# Allegro board KEY_ARRAY.brd
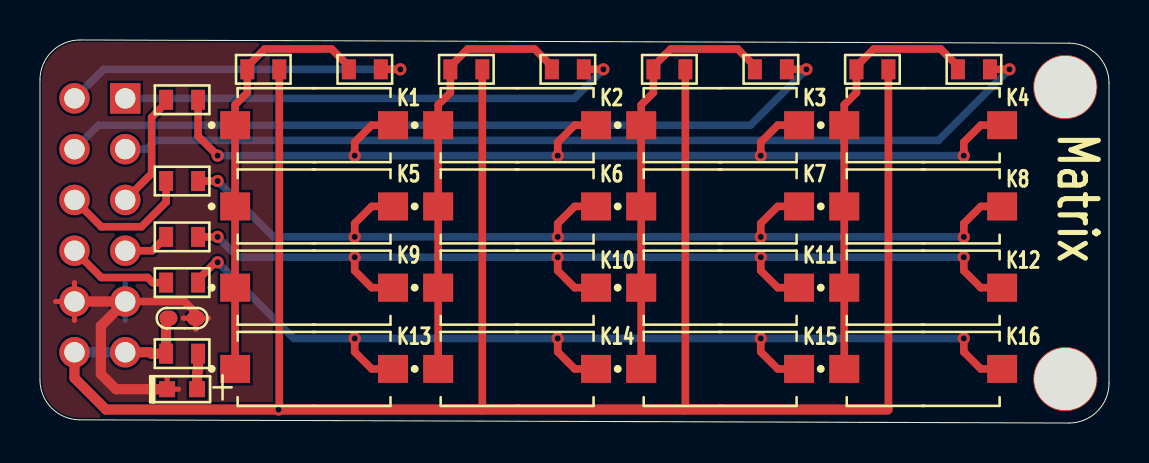
[diagram p0: board, top side]
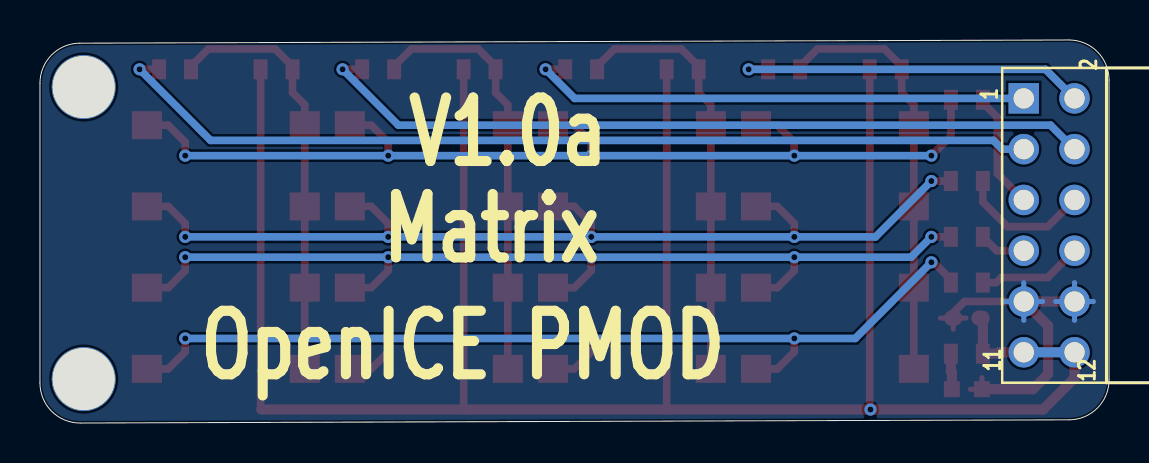
[diagram p1: board, bottom side, seen from below]

Outline 53.5 x 19.16 mm; copper layers: TOP, BOTTOM. Coordinates in mm from the lower left corner of the outline.
Outline path: 0,17.16 0,2.16 arc(0.58,0.75) 1.99,0.16 51.49,0 arc(52.91,0.58) 53.5,2 53.5,17 arc(52.91,18.41) 51.5,19 2.01,19.16 arc(0.59,18.58) 0,17.16

## Placement (name value [footprint] x y rotation side)
C1  0.1uF  [C0603]  7.11 5.25 180 top
JP1  PMOD  [HDR_F2X6_PMOD]  1.73 9.89 90 bottom
MP1  MountHole  [MGT3200CIR3200D]  51.31 16.81 0 top
MP2  MountHole  [MGT3200CIR3200D]  51.31 2.2 0 top
R1  10K  [R0603]  11.18 17.69 180 top
R2  10K  [R0603]  21.34 17.69 180 top
R3  10K  [R0603]  31.5 17.69 180 top
R4  10K  [R0603]  41.66 17.69 180 top
R5  100  [R0603]  16.26 17.69 0 top
R6  100  [R0603]  26.42 17.69 0 top
R7  100  [R0603]  36.58 17.69 0 top
R8  100  [R0603]  46.74 17.69 0 top
R9  100  [R0603]  7.11 16.17 180 top
R10  100  [R0603]  7.11 12.1 180 top
R11  100  [R0603]  7.11 9.31 180 top
R12  100  [R0603]  7.11 7.02 180 top
R13  100  [R0603]  7.11 3.47 0 top
S1  TL1015AF160QG  [SW_KEY_2PIN]  13.72 14.9 0 top
S2  TL1015AF160QG  [SW_KEY_2PIN]  23.88 14.9 0 top
S3  TL1015AF160QG  [SW_KEY_2PIN]  34.04 14.9 0 top
S4  TL1015AF160QG  [SW_KEY_2PIN]  44.2 14.9 0 top
S5  TL1015AF160QG  [SW_KEY_2PIN]  13.72 10.83 0 top
S6  TL1015AF160QG  [SW_KEY_2PIN]  23.88 10.83 0 top
S7  TL1015AF160QG  [SW_KEY_2PIN]  34.04 10.83 0 top
S8  TL1015AF160QG  [SW_KEY_2PIN]  44.2 10.83 0 top
S9  TL1015AF160QG  [SW_KEY_2PIN]  13.72 6.77 0 top
S10  TL1015AF160QG  [SW_KEY_2PIN]  23.88 6.77 0 top
S11  TL1015AF160QG  [SW_KEY_2PIN]  34.04 6.77 0 top
S12  TL1015AF160QG  [SW_KEY_2PIN]  44.2 6.77 0 top
S13  TL1015AF160QG  [SW_KEY_2PIN]  13.72 2.71 0 top
S14  TL1015AF160QG  [SW_KEY_2PIN]  23.88 2.71 0 top
S15  TL1015AF160QG  [SW_KEY_2PIN]  34.04 2.71 0 top
S16  TL1015AF160QG  [SW_KEY_2PIN]  44.2 2.71 0 top
V1  19-217UTD/S756-3/TR8  [LED0603]  7.11 1.69 0 top

## Library data of the parts
C1 = CAP
JP1 = HEADER 6X2_0
MP1 MP2 = MountHole
R1-R13 = RES
S1-S16 = TL1015AF160QG
V1 = LED

## Footprints (pads in the part's own frame, mm; a bottom-side part is the same pattern mirrored in y, then rotated)
C0603
  oval 0.914x0.762 smd: 1(-0.686,0) 2(0.686,0)
HDR_F2X6_PMOD
  rect 1.524x1.524 hole 1.016: 1(6.35,2.54)
  round 1.524 hole 1.016: 2(6.35,0) 3(3.81,2.54) 4(3.81,0) 5(1.27,2.54) 6(1.27,0) 7(-1.27,2.54) 8(-1.27,0) 9(-3.81,2.54) 10(-3.81,0) 11(-6.35,2.54) 12(-6.35,0)
LED0603
  rect 0.8x0.8 smd: A(0.75,0) C(-0.75,0)
MGT3200CIR3200D
  round 3.2 hole 3.1: 1(0,0)
R0603
  rect 0.7x1 smd: 1(-0.8,0) 2(0.8,0)
SW_KEY_2PIN
  rect 1.5x1.4 smd: 1(-3.95,0) 2(3.95,0)

## Nets
GND: C1.1 JP1.9 JP1.10 V1.C
VDD: C1.2 JP1.11 JP1.12 R1.1 R2.1 R3.1 R4.1 R13.1
KEY4X4_0: JP1.3 R8.2
KEY4X4_1: JP1.4 R7.2
KEY4X4_2: JP1.1 R6.2
KEY4X4_3: JP1.2 R5.2
KEY4X4_4: JP1.5 R9.2
KEY4X4_5: JP1.6 R10.2
KEY4X4_6: JP1.7 R11.2
KEY4X4_7: JP1.8 R12.2
N17274216: R9.1 S1.2 S2.2 S3.2 S4.2
N17275428: R10.1 S5.2 S6.2 S7.2 S8.2
N17275772: R11.1 S9.2 S10.2 S11.2 S12.2
N17276116: R12.1 S13.2 S14.2 S15.2 S16.2
N17276249: R2.2 R6.1 S2.1 S6.1 S10.1 S14.1
N17276371: R1.2 R5.1 S1.1 S5.1 S9.1 S13.1
N17276477: R3.2 R7.1 S3.1 S7.1 S11.1 S15.1
N17276514: R4.2 R8.1 S4.1 S8.1 S12.1 S16.1
N17305115: R13.2 V1.A

Pads without a net: MP1 1; MP2 1

## Via types
v1: diameter 0.61, hole 0.305, TOP to BOTTOM, 25 vias

## Routing (per net, layer and track width the routed paths; a pad name or vN(x,y) marks a point on that pad's centre or on a via; arc(x,y) is an arc through that point)
GND: length 27.7
  TOP w0.254: 7.16,5.25 C1.1 ; C1.1 8.43,5.25 ; C1.1 7.8,4.69 ; 1.73,5.14 JP1.10 ; JP1.10 1.73,7.02 ; JP1.10 0.79,6.08 ; 6.36,2.27 V1.C 6.94,1.69
  TOP w0.381: JP1.9 7.23,6.08 7.8,5.51 C1.1
  TOP w0.508: JP1.10 JP1.9 3.05,4.86 3.05,2.45 3.81,1.69 V1.C
  BOTTOM w0.254: 1.73,5.14 JP1.10 ; JP1.10 0.79,6.08 ; JP1.10 2.67,6.08 ; JP1.10 1.73,7.02 ; JP1.9 5.21,6.08 ; JP1.9 4.27,7.02 ; JP1.9 4.27,5.14 ; JP1.9 3.33,6.08
VDD: length 117.2
  TOP w0.381: R2.1 22.14,0.71 22.1,0.67 ; 32.26,0.67 32.3,0.71 R3.1 ; R1.1 11.98,0.71 v1(11.94,0.67) ; 42.42,0.67 42.46,0.71 R4.1
  TOP w0.508: C1.2 6.31,5.13 R13.1 5.58,3.47 5.51,3.54 JP1.11 ; 42.42,0.67 v1(11.94,0.67) 3.3,0.67 1.73,2.25 JP1.12
  BOTTOM w0.508: JP1.11 JP1.12
KEY4X4_0: length 46.9
  TOP w0.381: R8.2 v1(48.51,17.69)
  BOTTOM w0.381: JP1.3 5.35,13.7 5.78,14.14 44.96,14.14 v1(48.51,17.69)
KEY4X4_1: length 39.3
  TOP w0.381: R7.2 v1(38.35,17.69)
  BOTTOM w0.381: v1(38.35,17.69) 35.56,14.9 2.93,14.9 JP1.4
KEY4X4_2: length 25.5
  TOP w0.381: R6.2 v1(28.19,17.69)
  BOTTOM w0.381: JP1.1 26.74,16.24 v1(28.19,17.69)
KEY4X4_3: length 17.9
  TOP w0.381: R5.2 v1(18.03,17.69)
  BOTTOM w0.381: JP1.2 3.18,17.69 v1(18.03,17.69)
KEY4X4_4: length 5.9
  TOP w0.381: JP1.5 5.59,12.48 5.59,15.29 6.31,16.02 R9.2
KEY4X4_5: length 6.7
  TOP w0.381: JP1.6 3.07,9.82 5.08,9.82 6.31,11.05 R10.2
KEY4X4_6: length 2.3
  TOP w0.381: R11.2 5.62,8.62 JP1.7
KEY4X4_7: length 5.2
  TOP w0.381: R12.2 5.64,7.02 5.39,7.28 3.07,7.28 JP1.8
N17274216: length 52.3
  TOP w0.381: v1(25.91,13.37) 25.91,14.05 26.76,14.9 S2.2 ; v1(36.07,13.37) 36.07,14.05 36.92,14.9 S3.2 ; v1(15.75,13.37) 15.75,14.05 16.6,14.9 S1.2 ; R9.1 7.91,14.35 v1(8.89,13.37) ; v1(46.23,13.37) 46.23,14.05 47.08,14.9 S4.2
  BOTTOM w0.381: v1(8.89,13.37) v1(15.75,13.37) v1(25.91,13.37) v1(36.07,13.37) v1(46.23,13.37)
N17275428: length 51.2
  TOP w0.381: v1(25.91,9.31) 25.91,9.98 26.76,10.83 S6.2 ; v1(36.07,9.31) 36.07,9.98 36.92,10.83 S7.2 ; S5.2 16.6,10.83 15.75,9.98 v1(15.75,9.31) ; S8.2 47.08,10.83 46.23,9.98 v1(46.23,9.31) ; R10.1 v1(8.89,12.1)
  BOTTOM w0.381: v1(8.89,12.1) 11.68,9.31 v1(15.75,9.31) v1(25.91,9.31) v1(36.07,9.31) v1(46.23,9.31)
N17275772: length 50.5
  TOP w0.381: R11.1 v1(8.89,9.31) ; v1(15.75,8.29) 15.75,7.62 16.6,6.77 S9.2 ; S10.2 26.76,6.77 25.91,7.62 v1(25.91,8.29) ; v1(36.07,8.29) 36.07,7.62 36.92,6.77 S11.2 ; S12.2 47.08,6.77 46.23,7.62 v1(46.23,8.29)
  BOTTOM w0.381: v1(46.23,8.29) v1(36.07,8.29) v1(25.91,8.29) v1(15.75,8.29) 9.91,8.29 v1(8.89,9.31)
N17276116: length 52.2
  TOP w0.381: v1(36.07,4.23) 36.07,3.56 36.92,2.71 S15.2 ; S16.2 47.08,2.71 46.23,3.56 v1(46.23,4.23) ; v1(25.91,4.23) 25.91,3.56 26.76,2.71 S14.2 ; v1(8.89,8.04) 8.78,8.04 7.91,7.17 R12.1 ; S13.2 16.6,2.71 15.75,3.56 v1(15.75,4.23)
  BOTTOM w0.381: v1(46.23,4.23) v1(36.07,4.23) v1(25.91,4.23) v1(15.75,4.23) 12.7,4.23 v1(8.89,8.04)
N17276249: length 21.3
  TOP w0.381: R6.1 25.62,17.84 24.75,18.71 21.4,18.71 20.54,17.84 R2.2 20.54,16.53 19.93,15.92 S2.1 S6.1 S10.1 S14.1
N17276371: length 21.3
  TOP w0.381: S13.1 S9.1 S5.1 S1.1 9.77,15.92 10.38,16.53 R1.2 10.38,17.84 11.24,18.71 14.59,18.71 15.46,17.84 R5.1
N17276477: length 21.3
  TOP w0.381: S15.1 S11.1 S7.1 S3.1 30.09,15.92 30.7,16.53 R3.2 30.7,17.84 31.56,18.71 34.91,18.71 35.78,17.84 R7.1
N17276514: length 21.3
  TOP w0.381: S16.1 S12.1 S8.1 S4.1 40.25,15.92 40.86,16.53 R4.2 40.86,17.84 41.72,18.71 45.07,18.71 45.94,17.84 R8.1
N17305115: length 1.8
  TOP w0.508: R13.2 7.91,2.59 7.86,2.54 V1.A

## Copper pours and planes (outline as drawn; the poured copper is in the pictures)
GND on TOP: 51.5,18.9 52.84,18.34 53.39,17 53.39,2 52.84,0.66 51.49,0.1 1.99,0.26 0.66,0.82 0.1,2.16 0.1,17.16 0.66,18.5 2.01,19.06 ; 4 cut-outs
GND on BOTTOM: 53.39,2 52.84,0.66 51.49,0.1 1.99,0.26 0.66,0.82 0.1,2.16 0.1,17.16 0.66,18.5 2.01,19.06 51.5,18.9 52.84,18.34 53.39,17 ; 3 cut-outs

## Text on the board
Ref Des/Silkscreen Bottom: V1.0a | Matrix | OpenICE PMOD
User.Comments: 2
Ref Des/Silkscreen Top: K1 | K5 | K9 | K13 | K2 | K6 | K10 | K14 | K3 | K7 | K11 | K15 | K4 | K8 | K12 | K16 | Matrix
NCLEGEND-1-2: FIGURE | SIZE | 12.0 | 40.0 | 122.047 | DRILL CHART: TOP to BOTTOM | ALL UNITS ARE IN MILS | TOLERANCE | +0.0/-12.0 | +3.0/-3.0 | +2.953/-2.953 | PLATED | QTY | 25 | 12 | 2
